# Altium PCB ut_basketball_robot_mainboard_2018.PcbDoc
Units mm, origin at the board's own origin, x right, y up, seen from the top; angles counter-clockwise.
Board outline 55 x 37 mm, 2 copper layers (Top Layer, Bottom Layer), stack 1.571 mm thick; 79 components, 92 nets, 352 pads, 92 vias.
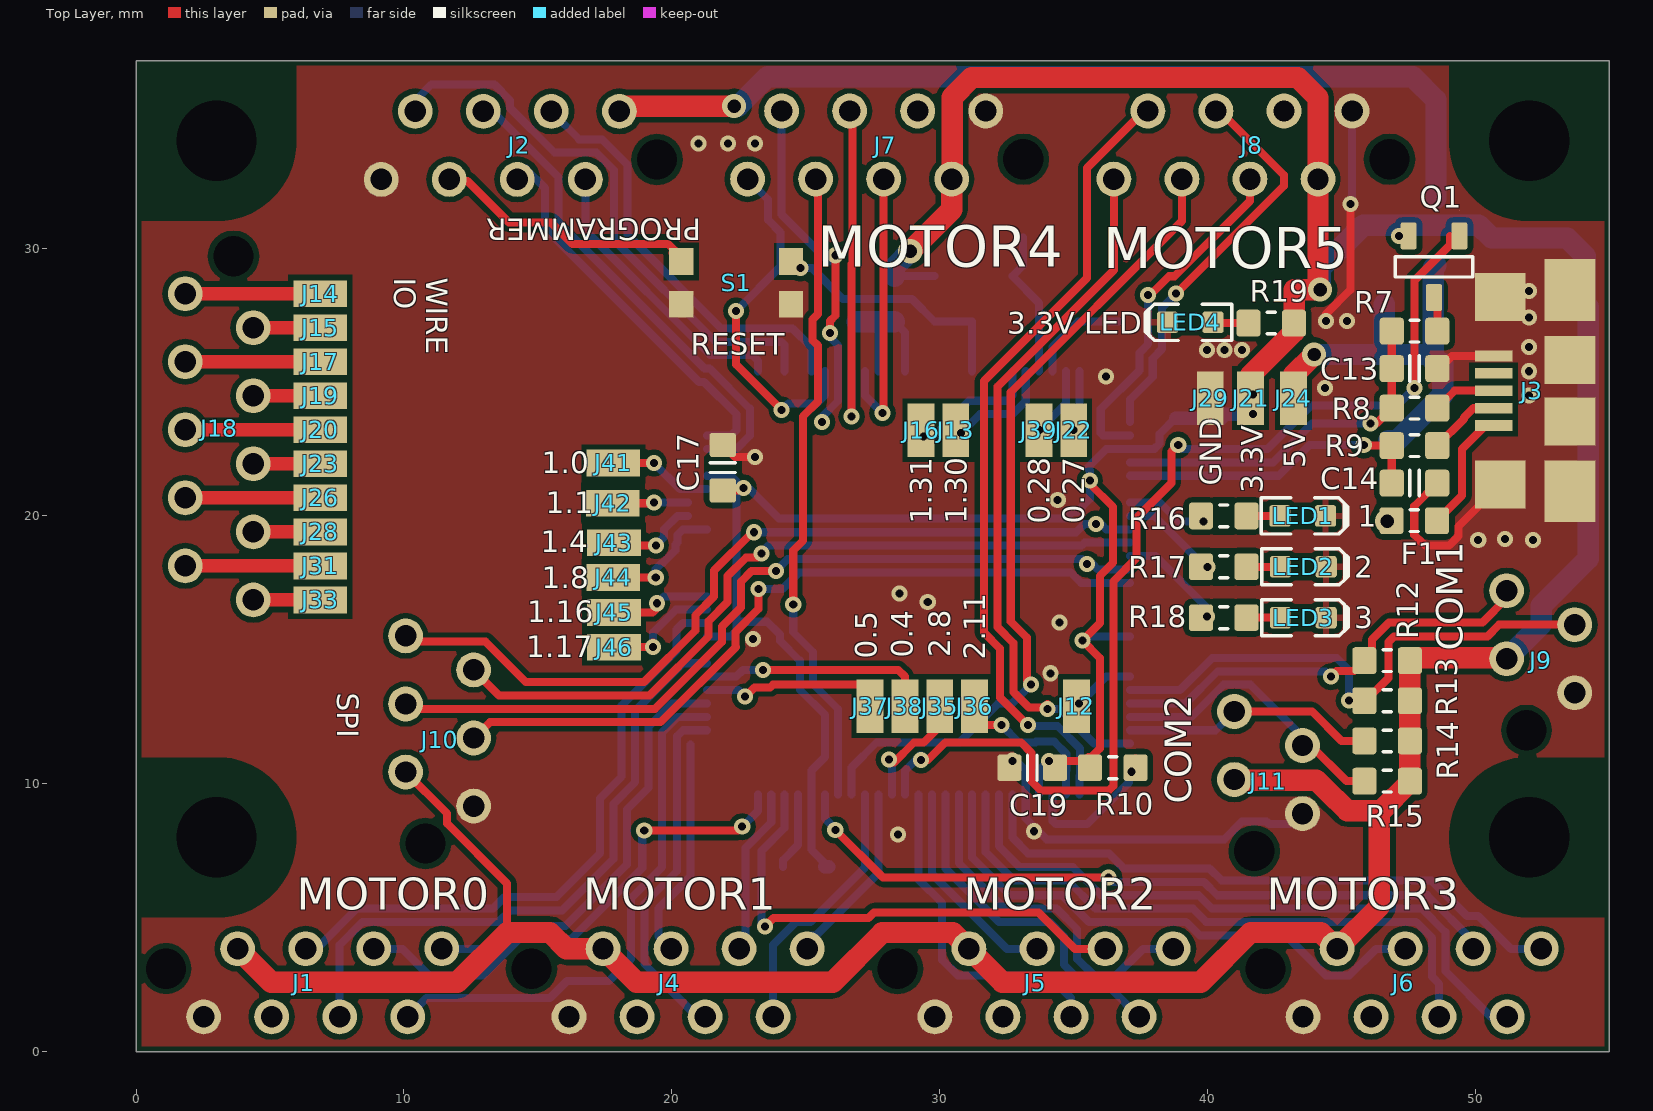
[diagram p0: Top Layer view]
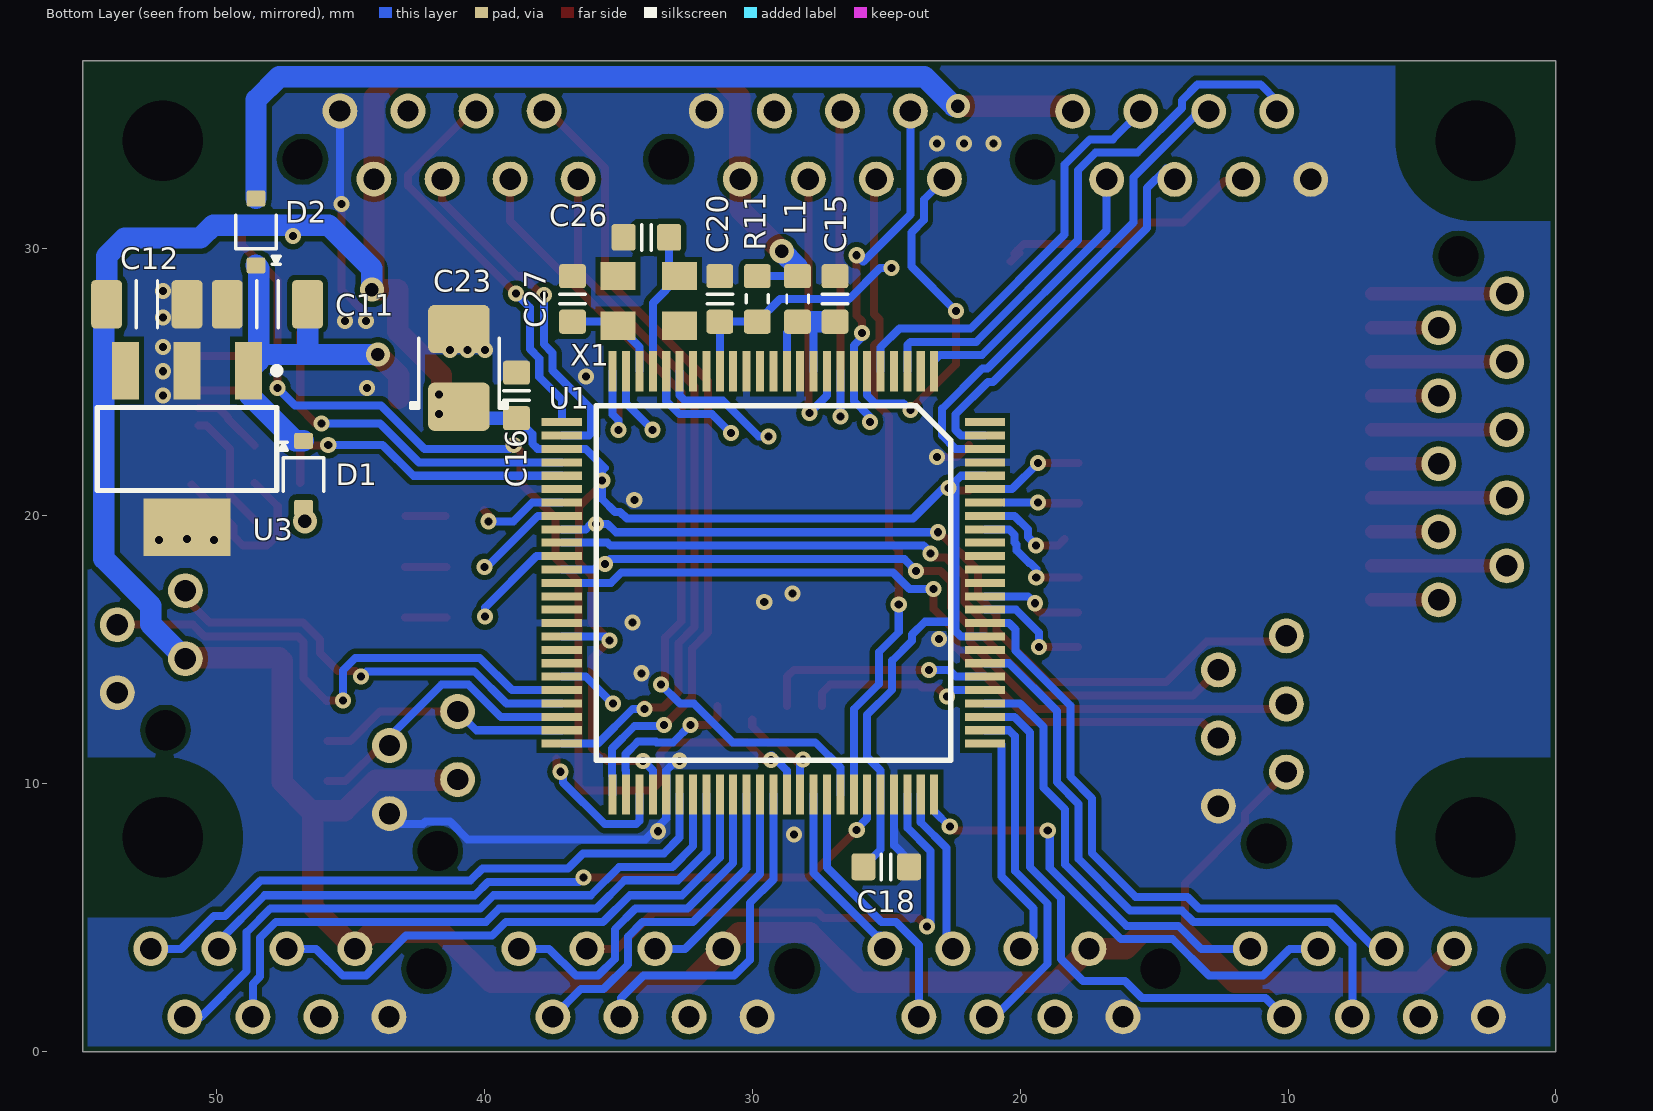
[diagram p1: Bottom Layer view, seen from below]

## Layer stack, top to bottom
Top Solder: solder mask 0.0102, Solder Resist, Dk 3.5
Top Layer: signal copper 0.0356
Dielectric 1: dielectric 1.5, FR-4, Dk 4.8
Bottom Layer: signal copper 0.0356
Bottom Solder: solder mask 0.0102, Solder Resist, Dk 3.5

## Board outline
0,0 55,0 55,37 0,37

## Design rules (kind name [scope] priority, off if disabled: settings)
BoardOutlineClearance [All] p1: gap=0.2 ignorepadtopadclearanceinfootprint=FALSE except(0: Arc-SplitContinuation Track-SplitContinuation SMDPad-SplitContinuation THPad-SplitContinuation Via-SplitContinuation Fill-SplitContinuation Poly-SplitContinuation Region-SplitContinuation Text-SplitContinuation)
Clearance [All] p1: gap=0.2 ignorepadtopadclearanceinfootprint=FALSE except(0: Arc-Hole Track-Hole SMDPad-Hole THPad-Hole Via-Hole Fill-Hole Poly-Hole Region-Hole Text-Hole)
ComponentClearance ComponentClearanceIgnore [HasFootprint('PAD-1020')] p1: gap=0 collisioncheckmode=3 verticalgap=0 showdistances=FALSE
ComponentClearance [All] p2: gap=0.2 collisioncheckmode=3 verticalgap=0.2 showdistances=FALSE
DiffPairsRouting [All] p1: maxlimit=0.3 minlimit=0.2 mostfreqgap=0.2 toplayer_minwidth=0.2 toplayer_maxwidth=0.5 toplayer_prefwidth=0.3 bottomlayer_minwidth=0.2 bottomlayer_maxwidth=0.5 bottomlayer_prefwidth=0.3 maxuncoupledlength=12.7
HoleSize [All] p1: absolutevalues=TRUE maxlimit=5 minlimit=0.3 maxpercent=80.000 minpercent=20.000
PlaneClearance [All] p1: clearance=0.5
PlaneConnect [All] p1: planeconnectstyle=Relief reliefexpansion=0.5 reliefentries=4 reliefconductorwidth=0.3 reliefairgap=0.2
PolygonConnect PolygonConnectDirect [IsVia or InComponent('U3') or InComponent('J3') or InComponent('S1') or InComponent('U4') or HasFootprint('CAPC3216X180N') or HasFootprint('CAPC1608X90N') or HasFootprint('RESC1608X55N') or HasFootprint('CAPMP3528X210N') or HasFootprint('MICRO-MATCH-FOB-04') or HasFootprint('MICRO-MATCH-FOB-06') or HasFootprint('MICRO-MATCH-FOB-08') or HasFootprint('MICRO-MATCH-FOB-10') or HasFootprint('PAD-1020')] p1: connectstyle=Direct reliefconductorwidth=0.2 reliefentries=4 polygonreliefangle="90 Angle" airgapwidth=0.2
PolygonConnect [All] p2: connectstyle=Relief reliefconductorwidth=0.25 reliefentries=4 polygonreliefangle="90 Angle" airgapwidth=0.2
RoomDefinition ut_bbr18_mb_usb [InComponentClass('ut_bbr18_mb_usb')] p1: confinementstyle=ConfineIn formatcopy=TRUE lockcomponents=FALSE outline -26.925,-28.025 132.15,-28.025 132.15,79.25 -26.925,79.25
RoomDefinition ut_basketball_robot_mainboard_2018 [InComponentClass('ut_basketball_robot_mainboard_2018')] p2: confinementstyle=ConfineIn formatcopy=TRUE lockcomponents=FALSE outline -6,-11 118,-11 118,72 -6,72
RoutingVias [All] p1: holewidth=0.3 width=0.6 viastyle="Through Hole" minholewidth=0.3 minwidth=0.6 maxholewidth=5 maxwidth=10
SilkToSilkClearance [All] p1: silktosilkclearance=0.2
SilkToSolderMaskClearance [IsPad] p1: minsilkscreentomaskgap=0.2 clearancetoexposedcopper=TRUE
SolderMaskExpansion SolderMaskExpansionTentedVia [IsVia And (Not IsTestpoint)] p1: expansion=-5
SolderMaskExpansion [All] p2: expansion=0.102
Width [All] p1: maxlimit=5 minlimit=0.2 preferedwidth=0.3
23 further rules are at their usual default settings.

## Classes and differential pairs
component class ut_bbr18_mb_usb: C13 C14 F1 J3 Q1 R7 R8 R9
component class ut_basketball_robot_mainboard_2018: C11 C12 C15 C16 C17 C18 C19 C20 C23 C26 C27 D1 D2 J1 J2 J4 J5 J6 J7 J8 J9 J10 J11 J12 J13 J14 J15 J16 J17 J18 J19 J20 J21 J22 J23 J24 J26 J28 J29 J31 J33 J35 J36 J37 J38 J39 J41 J42 J43 J44 J45 J46 L1 LED1 LED2 LED3 LED4 R10 R11 R12 R13 R14 R15 R16 R17 R18 R19 S1 U1 U3 X1

## Components (designator, comment, footprint, x,y, rotation, side; value= is the part's Value field where it differs from the comment)
C11 "10u" CAPC3216X180N 48.1,27.9 r0 bottom value=10µ
C12 "10u" CAPC3216X180N 52.6,27.9 r180 bottom value=10µ
C13 "18p" CAPC1608X90N 47.722,25.499 r180 top
C14 "18p" CAPC1608X90N 47.722,21.224 r0 top
C15 "1u" CAPC1608X90N 26.91,28.1 r90 bottom value=18p
C16 "10u Ta" CAPMP3528X210N 40.95,25.525 r90 bottom value=47µ
C17 "100n" CAPC1608X90N 21.9,21.8 r90 top value=18p
C18 "100n" CAPC1608X90N 25,6.9 r180 bottom value=18p
C19 "100n" CAPC1608X90N 33.451,10.6 r180 top value=18p
C20 "100n" CAPC1608X90N 31.21,28.1 r90 bottom value=18p
C23 "100n" CAPC1608X90N 38.8,24.5 r90 bottom value=18p
C26 "18p" CAPC1608X90N 33.95,30.4 r0 bottom
C27 "18p" CAPC1608X90N 36.71,28.1 r90 bottom
D1 "BAT60" SOD323 46.75,21.548 r270 bottom
D2 "BAT60" SOD323 48.523,30.6 r90 bottom
F1 "Slow-blow" RESC1608X55N 47.712,19.824 r0 top value=500mA
J1 "MOTOR0" MICRO-MATCH-FOB-08 2.52,1.3 r180 top
J2 "PROGRAMMER" MICRO-MATCH-FOB-08 18.04,35.1 r0 top
J3 "USB-B-MICRO" USB-B-MICRO-FCI-10104110 50.672,24.674 r90 top
J4 "MOTOR1" MICRO-MATCH-FOB-08 16.16,1.3 r180 top
J5 "MOTOR2" MICRO-MATCH-FOB-08 29.82,1.3 r180 top
J6 "MOTOR3" MICRO-MATCH-FOB-08 43.56,1.3 r180 top
J7 "MOTOR4" MICRO-MATCH-FOB-08 31.715,35.115 r0 top
J8 "MOTOR5" MICRO-MATCH-FOB-08 45.39,35.115 r0 top
J9 "COM1" MICRO-MATCH-FOB-04 53.7,13.4 r270 top
J10 "SPI" MICRO-MATCH-FOB-06 12.6,9.17 r270 top
J11 "COM2" MICRO-MATCH-FOB-04 43.54,8.89 r270 top
J12 "HEADER-1" PAD-1020 35.1,12.9 r180 top
J13 "HEADER-1" PAD-1020 30.6,23.2 r180 top
J14 "HEADER-1" PAD-1020 6.875,28.295 r90 top
J15 "HEADER-1" PAD-1020 6.875,27.025 r90 top
J16 "HEADER-1" PAD-1020 29.3,23.2 r180 top
J17 "HEADER-1" PAD-1020 6.875,25.755 r90 top
J18 "WIRE_IO" MICRO-MATCH-FOB-10 1.835,28.295 r90 top
J19 "HEADER-1" PAD-1020 6.875,24.485 r90 top
J20 "HEADER-1" PAD-1020 6.875,23.215 r90 top
J21 "HEADER-1" PAD-1020 41.6,24.4 r0 top
J22 "HEADER-1" PAD-1020 35,23.2 r0 top
J23 "HEADER-1" PAD-1020 6.875,21.945 r90 top
J24 "HEADER-1" PAD-1020 43.2,24.4 r0 top
J26 "HEADER-1" PAD-1020 6.875,20.675 r90 top
J28 "HEADER-1" PAD-1020 6.875,19.405 r90 top
J29 "HEADER-1" PAD-1020 40.1,24.4 r0 top
J31 "HEADER-1" PAD-1020 6.875,18.135 r90 top
J33 "HEADER-1" PAD-1020 6.875,16.865 r90 top
J35 "HEADER-1" PAD-1020 30,12.9 r0 top
J36 "HEADER-1" PAD-1020 31.3,12.9 r0 top
J37 "HEADER-1" PAD-1020 27.4,12.9 r0 top
J38 "HEADER-1" PAD-1020 28.7,12.9 r0 top
J39 "HEADER-1" PAD-1020 33.7,23.2 r180 top
J41 "HEADER-1" PAD-1020 17.819,21.978 r90 top
J42 "HEADER-1" PAD-1020 17.8,20.474 r90 top
J43 "HEADER-1" PAD-1020 17.84,19 r90 top
J44 "HEADER-1" PAD-1020 17.819,17.702 r90 top
J45 "HEADER-1" PAD-1020 17.84,16.4 r90 top
J46 "HEADER-1" PAD-1020 17.84,15.1 r90 top
L1 "10uH" INDC1608N 28.31,28.1 r90 bottom value="120R @ 100 MHz"
LED1 "White" LED-0603-WHITE 43.55,20 r0 top
LED2 "White" LED-0603-WHITE 43.57,18.1 r0 top
LED3 "White" LED-0603-WHITE 43.57,16.2 r0 top
LED4 "White" LED-0603-WHITE 39.35,27.225 r180 top
Q1 "BSS84" SOT23-3 48.45,29.3 r270 top
R7 "1.5k" RESC1608X55N 47.722,26.899 r0 top value=10K
R8 "33R" RESC1608X55N 47.722,24.024 r180 top value=10K
R9 "33R" RESC1608X55N 47.722,22.624 r180 top value=10K
R10 "10k" RESC1608X55N 36.46,10.6 r180 top value=10K
R11 "10k" RESC1608X55N 29.81,28.1 r270 bottom value=10K
R12 "10k" RESC1608X55N 46.7,14.6 r180 top value=10K
R13 "10k" RESC1608X55N 46.7,13.1 r180 top value=10K
R14 "10k" RESC1608X55N 46.7,11.6 r180 top value=10K
R15 "10k" RESC1608X55N 46.7,10.1 r180 top value=10K
R16 "1k" RESC1608X55N 40.6,20 r180 top value=120R
R17 "1k" RESC1608X55N 40.6,18.1 r180 top value=120R
R18 "1k" RESC1608X55N 40.6,16.2 r180 top value=120R
R19 "1k" RESC1608X55N 42.375,27.2 r0 top value=120R
S1 "PUSHBUTTON" KMR421NGLFS 22.4,28.7 r180 top
U1 "LPC1768" LQFP100 23.21,25.4 r270 bottom
U3 "MCP1825S" SOT230P700X180-4N 51.1,22.5 r270 bottom
X1 "12MHz" XTAL-3.2x2.5 35.01,27.1 r180 bottom

## Footprints (in the part's own frame and the unit in brackets; to place one, negate y for a bottom-side part, rotate by r counter-clockwise, add the part's x,y. Pads: shape width x height; smd on the part's side, far side on the other; paste and mask are expansions set on the pad)
CAPC1608X90N [mm] "Chip Capacitor, Body 1.6x0.8mm, EIA 0603, IPC Medium Density"
  round 0.254 on Mech15: 0(0,0)
  rrect25% 0.9x1 smd: 1(-0.85,0) 2(0.85,0)
  Top Layer pour cut-out: -0.6,0.5 -0.4,0.7 0.4,0.7 0.6,0.5 0.6,-0.5 0.4,-0.7 -0.4,-0.7 -0.6,-0.5
  silkscreen extent -0.18,-0.48 0.18,0.48, body extent -0.85,-0.45 0.85,0.45, height 0.89
CAPC3216X180N [mm] "Chip Capacitor, Body 3.2x1.6mm, 1.8mm H, EIA 1206, IPC Medium Density"
  round 0.508 on Mech15: 0(0,0)
  rrect25% 1.15x1.8 smd: 1(-1.5,0) 2(1.5,0)
  silkscreen extent -0.4,-0.88 0.4,0.88, body extent -1.7,-0.9 1.7,0.9, height 1.8
CAPMP3528X210N [mm] "Molded body capacitor, Body 3.5x2.8mm, 1210, IPC Nominal settings"
  round 0.254 on Mech15: 0(0,0)
  rrect25% 1.8x2.3 smd: 1(-1.45,0) 2(1.45,0)
  Top Layer pour cut-out: -0.508,1.27 0.508,1.27 0.508,-1.27 -0.508,-1.27
  silkscreen extent -1.5,-1.8 1.1,1.8, body extent -1.75,-1.4 1.75,1.4, height 2.1
INDC1608N [mm] "Chip bead, Body 1.6x0.8mm, 0603, IPC Medium Density"
  round 0.254 on Mech15: 0(0,0)
  rrect25% 0.9x1 smd: 1(-0.85,0) 2(0.85,0)
  Top Layer pour cut-out: -0.4,0.6 0.4,0.6 0.4,-0.6 -0.4,-0.6
  silkscreen extent -0.15,-0.41 0.15,0.41, body extent -0.8,-0.4 0.8,0.4, height 0.79
KMR421NGLFS [mm]
  rect 0.9x1 smd: 1(-2.05,0.8) 1(2.05,0.8) 2(-2.05,-0.8) 2(2.05,-0.8)
  body extent -2.1,-1.4 2.1,1.4, height 2.5
LED-0603-WHITE [mm]
  round 0.254 on Mech15: 0(0,0)
  rrect25% 0.8x0.8 smd: A(-0.85,0) K(0.85,0)
  Top Layer pour cut-out: -0.5,0.5 0.5,0.5 0.5,-0.5 -0.5,-0.5
  silkscreen extent -1.55,-0.67 1.68,0.67, body extent -0.8,-0.4 0.8,0.4, height 0.75
LQFP100 [mm]
  rect 1.5x0.3 smd: 1(0,0) 2(0,-0.5) 3(0,-1) 4(0,-1.5) 5(0,-2) 6(0,-2.5) 7(0,-3) 8(0,-3.5) 9(0,-4) 10(0,-4.5) 11(0,-5) 12(0,-5.5) 13(0,-6) 14(0,-6.5) 15(0,-7) 16(0,-7.5) 17(0,-8) 18(0,-8.5) 19(0,-9) 20(0,-9.5) 21(0,-10) 22(0,-10.5) 23(0,-11) 24(0,-11.5) 25(0,-12) 51(15.8,-12) 52(15.8,-11.5) 53(15.8,-11) 54(15.8,-10.5) 55(15.8,-10) 56(15.8,-9.5) 57(15.8,-9) 58(15.8,-8.5) 59(15.8,-8) 60(15.8,-7.5) 61(15.8,-7) 62(15.8,-6.5) 63(15.8,-6) 64(15.8,-5.5) 65(15.8,-5) 66(15.8,-4.5) 67(15.8,-4) 68(15.8,-3.5) 69(15.8,-3) 70(15.8,-2.5) 71(15.8,-2) 72(15.8,-1.5) 73(15.8,-1) 74(15.8,-0.5) 75(15.8,0)
  rect 0.3x1.5 smd: 26(1.9,-13.9) 27(2.4,-13.9) 28(2.9,-13.9) 29(3.4,-13.9) 30(3.9,-13.9) 31(4.4,-13.9) 32(4.9,-13.9) 33(5.4,-13.9) 34(5.9,-13.9) 35(6.4,-13.9) 36(6.9,-13.9) 37(7.4,-13.9) 38(7.9,-13.9) 39(8.4,-13.9) 40(8.9,-13.9) 41(9.4,-13.9) 42(9.9,-13.9) 43(10.4,-13.9) 44(10.9,-13.9) 45(11.4,-13.9) 46(11.9,-13.9) 47(12.4,-13.9) 48(12.9,-13.9) 49(13.4,-13.9) 50(13.9,-13.9) 76(13.9,1.9) 77(13.4,1.9) 78(12.9,1.9) 79(12.4,1.9) 80(11.9,1.9) 81(11.4,1.9) 82(10.9,1.9) 83(10.4,1.9) 84(9.9,1.9) 85(9.4,1.9) 86(8.9,1.9) 87(8.4,1.9) 88(7.9,1.9) 89(7.4,1.9) 90(6.9,1.9) 91(6.4,1.9) 92(5.9,1.9) 93(5.4,1.9) 94(4.9,1.9) 95(4.4,1.9) 96(3.9,1.9) 97(3.4,1.9) 98(2.9,1.9) 99(2.4,1.9) 100(1.9,1.9)
  silkscreen extent 1.28,-12.61 14.51,0.62, body extent -0.1,-14 15.9,2, height 1.6
MICRO-MATCH-FOB-04 [mm]
  round 1.3 hole 0.8: 1(0,0) 2(-1.27,-2.54) 3(-2.54,0) 4(-3.81,-2.54)
  round 0 hole 1.5 unplated: drill(1.4,-1.8)
  body extent -5.41,-3.77 1.6,1.23, height 4
MICRO-MATCH-FOB-06 [mm]
  round 1.3 hole 0.8: 1(0,0) 2(-1.27,-2.54) 3(-2.54,0) 4(-3.81,-2.54) 5(-5.08,0) 6(-6.35,-2.54)
  round 0 hole 1.5 unplated: drill(1.4,-1.8)
  body extent -7.95,-3.77 1.6,1.23, height 4
MICRO-MATCH-FOB-08 [mm]
  round 1.3 hole 0.8: 1(0,0) 2(-1.27,-2.54) 3(-2.54,0) 4(-3.81,-2.54) 5(-5.08,0) 6(-6.35,-2.54) 7(-7.62,0) 8(-8.89,-2.54)
  round 0 hole 1.5 unplated: drill(1.4,-1.8)
  body extent -10.49,-3.77 1.6,1.23, height 4
MICRO-MATCH-FOB-10 [mm]
  round 1.3 hole 0.8: 1(0,0) 2(-1.27,-2.54) 3(-2.54,0) 4(-3.81,-2.54) 5(-5.08,0) 6(-6.35,-2.54) 7(-7.62,0) 8(-8.89,-2.54) 9(-10.16,0) 10(-11.43,-2.54)
  round 0 hole 1.5 unplated: drill(1.4,-1.8)
  body extent -13.03,-3.77 1.6,1.23, height 4
PAD-1020 [mm]
  rect 1x2 smd: 1(0,0)
RESC1608X55N [mm] "Chip Resistor, Body 1.6x0.8mm, EIA 0603, IPC Medium Density"
  round 0.254 on Mech15: 0(0,0)
  rrect25% 0.9x1 smd: 1(-0.85,0) 2(0.85,0)
  Top Layer pour cut-out: -0.6,0.5 -0.4,0.7 0.4,0.7 0.6,0.5 0.6,-0.5 0.4,-0.7 -0.4,-0.7 -0.6,-0.5
  silkscreen extent -0.15,-0.41 0.15,0.41, body extent -0.87,-0.47 0.88,0.48, height 0.54
SOD323 [mm] "SOD-323; 2 Leads; Body 1.8 x 1.35 mm, (LxW)"
  round 0.508 on Mech15: 0(0,0)
  rrect25% 0.6x0.7 smd: A(1.25,0) K(-1.25,0)
  silkscreen extent -1.2,-0.9 0.64,0.75, body extent -1.3,-0.68 1.3,0.67, height 1.1
SOT23-3 [mm] "SOT23, 3 pin"
  round 0.5 on Mech15: 0(0,0)
  rrect25% 1x0.6 smd: 1(-1.15,0.95) 2(-1.15,-0.95) 3(1.15,0)
  silkscreen extent -0.38,-1.45 0.38,1.45, body extent -1.4,-1.45 1.4,1.45, height 1.29
SOT230P700X180-4N [mm] "SOT223, 4-Leads, Body 6,50x7,00mm (avg), Pitch 2,30mm, IPC Medium Density"
  rect 2.15x1 smd: 1(-2.925,2.3) 2(-2.925,0) 3(-2.925,-2.3)
  rect 2.15x3.25 smd: 4(2.925,0)
  silkscreen extent -3.05,-3.35 1.55,3.47, body extent -1.85,-3.35 1.85,3.35, height 1.8
USB-B-MICRO-FCI-10104110 [mm]
  rect 0.4x1.4 smd: 1(-1.3,0) 2(-0.65,0) 3(0,0) 4(0.65,0) 5(1.3,0)
  rect 2.3x1.9 smd: SH(-3.75,-2.85) SH(3.758,-2.85)
  rect 1.8x1.9 smd: SH(-3.5,-0.25) SH(-1.15,-2.85) SH(1.15,-2.85) SH(3.5,-0.25)
  body extent -4.04,-5.55 4.04,0.01, height 2.68
XTAL-3.2x2.5 [mm]
  rect 1.3x1.05 smd: 1(0,0) 2(2.3,0) 3(2.3,1.85) 4(0,1.85)
  body extent -0.45,-0.32 2.75,2.18, height 0.8

## Part data
C11 C12: library part CAPC_10u_1206_10V, "Capacitor SMD Cer 10uF 10% 10V X5R 1206", Manufacturer 1=KEMET, Manufacturer Part Number 1=C1206C106K8PACTU, Package / Case="1206 (3216 metric)", Ratings="10V; X5R", Supplier Part Number 1=C1206C106K8PACTU-ND, Tolerance=±10%, Material=ceramic, SCDType=undef, Supplier 1=Digi-Key
C13 C14 C15 C17 C18 C19 C20 C23 C26 C27: library part CAPC_18p_0603_100V, "Capacitor SMD Cer 18pF 2% 100V NP0 0603", Manufacturer 1="AVX Corporation", Manufacturer Part Number 1=06031A180GAT2A, Operating Temperature="-55°C ~ 125°C", Package / Case="0603 (1608 Metric)", Ratings="100V; NP0", Supplier Part Number 1=478-6025-1-ND, Tolerance=±2%, ComponentLink1Description=http://www.avx.com/docs/Catalogs/ccog.pdf, ComponentLink1URL=http://www.avx.com/docs/Catalogs/ccog.pdf, SCDType=spec, Size / Dimension="0.063\" L x 0.032\" W (1.60mm x 0.81mm)", Supplier 1=Digi-Key, Thickness (Max)="0.035\" (0.90mm)"
C16: library part CAPT_47u_1210_6V3, "Capacitor SMD Tantalum 47uF 20% 6.3V 1210", ESR (Equivalent Series Resistance)="70.0 mOhm", Manufacturer 1="AVX Corporation", Manufacturer Part Number 1=TCJB476M006R0070, Manufacturer Size Code=B, Operating Temperature="-55°C ~ 125°C", Package / Case="1210 (3528 Metric)", Ratings=6.3V, Supplier Part Number 1=478-3139-1-ND, Tolerance=±20%, Voltage - Rated=6V3, ComponentLink1Description=http://www.avx.com/docs/Catalogs/tcj.pdf, ComponentLink1URL=http://www.avx.com/docs/Catalogs/tcj.pdf, Height - Seated (Max)="0.083\" (2.10mm)", Material=Tantalum, SCDType=spec, Size / Dimension="0.138\" L x 0.110\" W (3.50mm x 2.80mm)", Supplier 1=Digi-Key, Type=Molded
D1 D2: library part DIODE_SCHOTTKY_SS0520, "Diode Schottky SMD 20V 0.5A SOD123", Manufacturer 1="Fairchild Semiconductor", Manufacturer 2="ON Semiconductor", Manufacturer 3="Diodes Inc", Manufacturer 4="DC Components Co", Manufacturer Part Number 1=MBR0520L, Manufacturer Part Number 2=MBR0520LT1G, Manufacturer Part Number 3=B0520LW-7-F, Manufacturer Part Number 4=SS0520, Package / Case=SOD-123, Ratings="20V; 0.5A", Supplier Part Number 1=MBR0520LCT-ND, ComponentLink1Description=http://www.fairchildsemi.com/ds/MB/MBR0520L.pdf, ComponentLink1URL=http://www.fairchildsemi.com/ds/MB/MBR0520L.pdf, ComponentLink2Description=http://www.onsemi.com/pub_link/Collateral/MBR0520LT1-D.PDF, ComponentLink2URL=http://www.onsemi.com/pub_link/Collateral/MBR0520LT1-D.PDF, ComponentLink3Description=http://www.diodes.com/datasheets/ds30051.pdf, ComponentLink3URL=http://www.diodes.com/datasheets/ds30051.pdf, Material=Si, SCDType=source, Supplier 1=Digi-Key, Supplier 2=Digi-Key, Supplier 3=Digi-Key, Supplier Part Number 2=MBR0520LT1GOSCT-ND, Supplier Part Number 3=B0520LW-FDICT-ND
F1: library part FUSE_160mA_0603, "Fuse 160mA 63VDC 0603 SMD", Manufacturer 1="Holly Fuse", Manufacturer Part Number 1=06T-0160L, Package / Case="0603 (1608 metric)", Ratings="160mA; 63VDC; slow-blow", SCDType=spec
J1 J2 J4 J5 J6 J7 J8: library part HEADER-8
J9 J11: library part HEADER-4
J10: library part HEADER-6
J18: library part HEADER-10
L1: library part FERRITE_120R-100MHz_0603, "Ferrite bead 120 Ohm at 100 MHz 2A 0603 SMD", Current=900mA, Current Rating=2A, DC Resistance (DCR)="172.9 mOhm Max", Frequency - Self Resonant=23MHz, Frequency - Test=100kHz, Impedance @ Frequency="120 Ohm @ 100MHz", Manufacturer 1="Murata Electronics North America", Manufacturer Part Number 1=BLM18PG121SN1D, Operating Temperature="-40°C ~ 105°C", Package / Case="1210 (3225 Metric)", Ratings="2 A; 50 mO DC", Supplier Part Number 1=490-1037-1-ND, Applications="Power Supplies", ComponentLink1Description=http://www.yuden.co.jp/ut/product/pdf/wound02_e.pdf, ComponentLink1URL=http://www.yuden.co.jp/ut/product/pdf/wound02_e.pdf, ComponentLink2Description=http://search.murata.co.jp/Ceramy/image/img/PDF/ENG/L0110S0100BLM18P.pdf, ComponentLink2URL=http://search.murata.co.jp/Ceramy/image/img/PDF/ENG/L0110S0100BLM18P.pdf, Current - Saturation=900mA, Current - Temperature Rise=900mA, Filter Type="Differential Mode - Single", Height (Max)="0.037\" (0.95mm)", Mounting Type="Surface Mount", Number of Lines=1, SCDType=source, Size / Dimension="0.063\" L x 0.031\" W (1.60mm x 0.80mm)", Supplier 1=Digi-Key
LED1 LED2 LED3 LED4: library part LED_SMD_White_0603_Bright, "LED 0603 SMD Bright White 8700K", Luminous Flux @ Current - Test=-, Manufacturer 1="Lite-On Inc", Manufacturer 2="Kingbright Corp", Manufacturer Part Number 1=LTW-C193TS5, Manufacturer Part Number 2=APT1608QWF/D, Millicandela Rating=230mcd, Package / Case="0603 (1608 metric)", Ratings="Ultra Bright; 8700K", Supplier Part Number 1=160-1721-1-ND, Voltage - Forward (Vf) @ 10mA=3.0V, Voltage - Forward (Vf) Typ=3.3V, Color=White, ComponentLink1Description=http://media.digikey.com/pdf/Data%20Sheets/Lite-On%20PDFs/LTW-C193TS5.pdf, ComponentLink1URL=http://media.digikey.com/pdf/Data%20Sheets/Lite-On%20PDFs/LTW-C193TS5.pdf, ComponentLink2Description=http://www.kingbrightusa.com/images/catalog/SPEC/APT1608QWF-D.pdf, ComponentLink2URL=http://www.kingbrightusa.com/images/catalog/SPEC/APT1608QWF-D.pdf, Lens Style/Size="Rectangle with Flat Top, 0.8mm x 1.1mm", Lens Type="Clear, Tinted", Material=InGaN, Mounting Type="Surface Mount", SCDType=source, Size / Dimension="1.60mm L x 0.80mm W", Supplier 1=Digi-Key, Supplier 2=Digi-Key, Supplier Part Number 2=APT1608QWF/D-ND, Viewing Angle=120°
Q1: library part MOSFET_BSS84, "MOSFET SMD P-CH 50V 130mA SOT23-3", Current - Continuous Drain (Id) @ 25° C=130mA, Drain to Source Voltage (Vdss)=50V, Input Capacitance (Ciss) @ Vds="73pF @ 25V", Manufacturer 1="Fairchild Semiconductor", Package / Case=SOT23-3, Power - Max=360mW, Ratings="50V; 130mA", Supplier Device Package=SOT-23, Supplier Part Number 1=BSS84CT-ND, ComponentLink1Description=http://www.fairchildsemi.com/ds/BS/BSS84.pdf, ComponentLink1URL=http://www.fairchildsemi.com/ds/BS/BSS84.pdf, FET Feature="Logic Level Gate", FET Type="MOSFET P-Channel, Metal Oxide", Gate Charge (Qg) @ Vgs="1.3nC @ 5V", Manufacturer Part Number 1=BSS84, Material="Metal Oxide", Rds On (Max) @ Id, Vgs="10 Ohm @ 100mA, 5V", SCDType=undef, Supplier 1=Digi-Key, Vgs(th) (Max) @ Id="2V @ 1mA"
R7 R8 R9 R10 R11 R12 R13 R14 R15: library part RES_10K_0603_5%, "Resistor SMD chip 10k Ohm 0.1W 5% 0603", Manufacturer 1=Yageo, Manufacturer 2="Vishay Dale", Manufacturer Part Number 1=RC0603JR-0710KL, Manufacturer Part Number 2=CRCW060310K0JNEA, Package / Case="0603 (1608 metric)", Ratings="1/10 W", Supplier Part Number 1=311-10KGRCT-ND, Tolerance=±5%, ComponentLink1Description=http://www.yageo.com/documents/recent/PYu-RC0603_51_RoHS_L_4.pdf, ComponentLink1URL=http://www.yageo.com/documents/recent/PYu-RC0603_51_RoHS_L_4.pdf, ComponentLink2Description=http://www.vishay.com/doc?20035, ComponentLink2URL=http://www.vishay.com/doc?20035, Material="Thick Film", SCDType=spec, Supplier 1=Digi-Key, Supplier 2=Digi-Key, Supplier Part Number 2=541-10KGCT-ND
R16 R17 R18 R19: library part RES_120R_0603_5%, "Resistor SMD chip 120 Ohm 0.1W 5% 0603", Manufacturer 1="Vishay Dale", Manufacturer 2=Yageo, Manufacturer Part Number 1=CRCW0603120RJNEA, Manufacturer Part Number 2=RC0603JR-07120RL, Package / Case="0603 (1608 metric)", Ratings="1/10 W", Supplier Part Number 1=541-120GCT-ND, Tolerance=±5%, ComponentLink1Description=http://www.vishay.com/doc?20035, ComponentLink1URL=http://www.vishay.com/doc?20035, ComponentLink2Description=http://www.yageo.com/documents/recent/PYu-RC0603_51_RoHS_L_4.pdf, ComponentLink2URL=http://www.yageo.com/documents/recent/PYu-RC0603_51_RoHS_L_4.pdf, Material="Thick Film", SCDType=spec, Supplier 1=Digi-Key, Supplier 2=Digi-Key, Supplier Part Number 2=311-120GRCT-ND
U3: library part MIC5239
X1: library part XTAL-3.2X2.5

## Free pads (board coordinates)
  round 0 hole 3 unplated: 42(52,8) 43(3,8) 44(3,34) 45(52,34)

## Via types
v1: diameter 0.6, hole 0.3, Top Layer to Bottom Layer, 87 vias
v2: diameter 0.9, hole 0.5, Top Layer to Bottom Layer, 5 vias

## Nets (pads, with @x,y where several pads share a name; then routed paths per layer and width w, separated by ;. In a path a pad name is that pad's centre, name@x,y a point inside that pad or via, vN(x,y) a via of type N, cw(c..) or ccw(c..) an arc to the next point about the centre after c; other vN are vias at no path point)
0.4: J38.1 U1.81 | length 8.7
  Top Layer w0.3: v1(23.4,14.25) 28.45,14.25 28.7,14 J38.1
  Bottom Layer w0.3: U1.81 22.4,14 22.65,14.25 v1(23.4,14.25)
0.5: J37.1 U1.80 | length 7
  Top Layer w0.3: v1(22.732,13.252) 23.08,13.6 23.669,13.6 23.769,13.7 27.1,13.7 27.4,13.4 J37.1
  Bottom Layer w0.3: U1.80 22.484,13.5 v1(22.732,13.252)
1.0: J41.1 U1.95 | length 3.9
  Top Layer w0.3: J41.1 v1(19.326,21.978)
  Bottom Layer w0.3: v1(19.326,21.978) 20.304,21 U1.95
1.1: J42.1 U1.94 | length 2.8
  Top Layer w0.3: J42.1 19.3,20.474 v1(19.326,20.5)
  Bottom Layer w0.3: v1(19.326,20.5) U1.94@20.605,20.5
1.16: J45.1 U1.87 | length 3.8
  Top Layer w0.3: J45.1 19.275,16.4 19.44,16.565 v1(19.44,16.74)
  Bottom Layer w0.3: v1(19.44,16.74) 19.7,17 U1.87
1.17: J46.1 U1.86 | length 4.6
  Top Layer w0.3: J46.1 19.123,15.1 19.3,15.277 v1(19.3,15.1)
  Bottom Layer w0.3: v1(19.3,15.1) 19.3,15.64 20.16,16.5 U1.86
3.3V: C12.1 C16.1 C17.1 C18.1 C19.1 C23.1 J1.2 J4.2 J5.2 J6.2 J7.2 J8.2 J9.2 J10.2 J11.2 J21.1 L1.2 Q1.2 R10.2 R11.1 R12.1 R13.1 R14.1 R15.1 R19.2 U1.28 U1.42 U1.54 U1.71 U1.84 U1.96 U3.3 | length 198.5
  Top Layer w0.3: J10.2 11.6,8.9 11.6,8.526 13.85,6.276 13.85,4.45 ; C17.1 22.578,20.95 v1(22.667,21.038) ; v1(34.077,10.851) 35.409,10.851 35.559,11.001 35.61,10.95 35.975,11.315 35.975,14.702 v1(35.327,15.351) 35.985,16.009 35.985,17.766 36.475,18.256 36.475,20.328 35.6,21.203 v1(35.6,21.315)
  Top Layer w0.8: J1.2 5.04,2.59 11.99,2.59 13.85,4.45 15.45,4.45 16.06,3.84 J4.2 18.68,2.59 26,2.59 27.86,4.45 30.48,4.45 J5.2 32.34,2.59 39.741,2.59 41.601,4.45 42.719,4.45 44.22,4.45 J6.2 46.412,5.422 46.412,8.93 46.483,9 ; v2(28.9,29.881) 30.445,31.426 J7.2 30.465,32.595 30.465,35.633 31.197,36.365 43.368,36.365 44.12,35.613 J8.2 44.12,28.527 v2(44.2,28.447) 43.225,28.447 R19.2 43.225,26.873 41.6,25.248 J21.1 ; J11.2 41.02,10.14 44.058,10.14 44.79,9.408 44.81,9.408 45.217,9 46.483,9 ; J9.2@51.16,14.7 47.65,14.7 R12.1 R13.1 R14.1 R15.1 47.55,10.067 46.483,9
  Bottom Layer w0.3: U1.84 22.205,15.5 22.41,15.705 22.41,15.925 ; U1.96 22.205,21.5 22.41,21.295 22.41,15.925 ; v1(22.667,21.038) 22.858,21.038 23.996,19.9 34.681,19.9 34.931,20.15 35.127,20.15 35.6,20.623 v1(35.6,21.315) 35.6,21.695 35.505,21.79 36.215,22.5 U1.28 38.018,22.5 38.018,22.513 38.21,22.705 38.21,23.06 C23.1 ; C18.1 25.21,7.54 U1.71 25.21,10.495 25.71,10.995 25.71,12.578 24.777,13.511 24.777,14.596 24.031,15.341 24.031,15.57 23.552,16.05 22.535,16.05 22.41,15.925 ; L1.2 R11.1 ; U1.54 33.71,10.495 34.066,10.851 v1(34.077,10.851) v1@34.027,10.9 ; v1(35.327,15.351) 35.476,15.5 U1.42
  Bottom Layer w0.5: C18.1@25.7,6.9 C18.1 ; C23.1 40.533,23.65 40.683,23.8 v1(41.7,23.8)
  Bottom Layer w0.8: L1.2 28.31,29.291 v2(28.9,29.881) ; v2(44.2,28.447) 44.2,29.243 45.807,30.85 50.125,30.85 50.6,30.375 53.424,30.375 54.1,29.699 C12.1 54.2,27.8 54.2,18.4 52.45,16.65 52.45,15.96 J9.2
  other v1: 41.7,24.525 47.15,30.45
5V: C11.1 D1.K D2.K J24.1 U3.1 | length 15.9
  Top Layer w0.8: J24.1 43.2,25.25 v2(43.975,26.025)
  Bottom Layer w0.8: v2(43.975,26.025) 46.6,26.025 ; C11.1 46.6,26.025 ; D1.K 47.055,22.798 48.774,24.516 48.774,25.702 48.523,25.702 U3.1@48.425,25.8 ; D2.K 48.425,29.252 48.425,26.025 46.6,26.025
5V_IF: D2.A J2.1 | length 35.1
  Top Layer w0.8: J2.1 18.24,35.3 v2(22.325,35.3)
  Bottom Layer w0.8: v2(22.325,35.3) 22.482,35.3 23.572,36.39 47.661,36.39 48.523,35.528 D2.A
5V_USB: D1.A F1.1 | length 0.2
  Top Layer w0.5: F1.1@46.7,19.7 v2(46.7,19.8)
  Bottom Layer w0.5: v2@46.6,19.9 v2(46.7,19.8)
D+: J3.3 R8.1 | length 2.4
  Top Layer w0.3: R8.1 49.222,24.674 J3.3
D-: J3.2 R9.1 | length 2.7
  Top Layer w0.3: R9.1 49.571,23.623 49.571,23.671 49.924,24.024 J3.2
GND: C11.2 C12.2 C13.1 C14.2 C15.2 C16.2 C17.2 C18.2 C19.2 C20.2 C23.2 C26.2 C27.2 J1.1 J2.8 J3.5 J3.SH J4.1 J5.1 J6.1 J7.1 J8.1 J9.1 J10.1 J11.1 J29.1 LED1.K LED2.K LED3.K LED4.K S1.1 U1.11 U1.15 U1.31 U1.41 U1.55 U1.72 U1.83 U1.97 U3.2 U3.4 | length 35.3
  Top Layer w0.3: C17.2 22.35,22.2 v1(23.1,22.2) ; C19.2@32.8,10.885 C19.2@32.82,10.885 ; v1(44.416,27.275) 44.416,27.532 45.325,28.441 v1(45.325,31.645) ; C14.2 47.712,20.364 47.712,19.295 48.033,18.974 48.048,18.974 48.122,18.9 49.017,18.9 49.362,19.245 49.362,19.614 J3.SH@50.922,21.174 ; C13.1@48.572,25.424 49.122,25.974 J3.5
  Bottom Layer w0.3: C18.2 24.15,7.15 24.71,7.71 U1.72 ; v1@32.82,10.885 33.21,10.495 U1.55 33.21,8.705 33.985,7.93 40.624,7.93 41.284,8.59 42.196,8.59 42.286,8.5 43.2,8.5 J11.1@43.6,8.9 ; v1(45.325,31.645) 45.39,31.71 J8.1
  other v1: 28.436,8.1 33.516,8.229 32.72,10.86 34.128,14.126 23.025,15.4 34.475,16.025 29.551,16.785 28.5,17.1 50.1,19.095 52.148,19.095 51.1,19.137 34.404,20.6 52,24.5 44.377,24.776 36.21,25.2 52,25.4 39.975,26.2 40.625,26.2 41.275,26.2 52,26.3 45.2,27.275 52,27.4 52,28.4 21,33.9 22.1,33.9 23.1,33.9
ISP: R10.1 U1.53 | length 5.4
  Top Layer w0.3: R10.1@37.31,10.45 R10.1@37.31,10.95
  Bottom Layer w0.3: U1.53 34.21,8.62 34.33,8.5 35.505,8.5 37.06,10.055 v1@37.06,10.45
  other v1: 37.16,10.45
LED1: R16.2 U1.32 | length 3.5
  Top Layer w0.3: v1(39.84,19.8) 39.84,20.044 R16.2@40.02,20.224
  Bottom Layer w0.3: U1.32 38.212,20.5 38.912,19.8 v1(39.84,19.8)
LED2: R17.2 U1.33 | length 3.7
  Bottom Layer w0.3: U1.33 38.005,20 39.905,18.1 v1(40,18.1)
LED3: R18.2 U1.36 | length 4.1
  Top Layer w0.3: v1(39.976,16.244) R18.2@40.02,16.2
  Bottom Layer w0.3: U1.36 38.05,18.5 39.976,16.574 v1(39.976,16.244)
M0_DIR1: J1.4 U1.85 | length 23.2
  Bottom Layer w0.3: J1.4 6.74,3.84 8.24,5.34 13.323,5.34 13.758,5.775 15.686,5.775 17.319,7.408 17.319,9.458 18.128,10.267 18.128,12.92 20.175,14.967 20.175,15.76 20.415,16 U1.85
M0_DIR2: J1.5 U1.82 | length 23.5
  Bottom Layer w0.3: J1.5 7.6,3.984 8.456,4.84 13.53,4.84 13.965,5.275 15.893,5.275 17.819,7.201 17.819,9.251 18.628,10.06 18.628,12.713 20.415,14.5 U1.82
M0_ENCA: J1.7 U1.78 | length 20.1
  Bottom Layer w0.3: J1.7 10.84,2 15.446,2 16.09,2.644 17.649,2.644 18.47,3.466 18.47,5.729 19.628,6.887 19.628,11.92 20.208,12.5 U1.78
M0_ENCB: J1.8 U1.79 | length 16.3
  Bottom Layer w0.3: J1.8@11.41,3.91 J1.8 13.237,3.84 14.097,4.7 16.025,4.7 18.319,6.994 18.319,9.044 19.128,9.853 19.128,12.127 20.001,13 U1.79
M0_PWM: J1.6 U1.75 | length 18.7
  Top Layer w0.3: v1@18.894,8.25 v1(18.969,8.25) 22.476,8.25 v1(22.626,8.4)
  Bottom Layer w0.3: J1.6 9.94,3.84 10.94,2.84 12.944,2.84 14.304,4.2 16.234,4.2 18.894,6.86 v1@18.894,8.25 ; v1(22.626,8.4) 23.21,8.984 U1.75
M1_DIR1: J4.4 U1.76 | length 8.3
  Bottom Layer w0.3: J4.4 19.5,4.31 19.5,5.345 20.7,6.545 U1.76@20.7,11.475
M1_DIR2: J4.5 U1.77 | length 13.3
  Bottom Layer w0.3: J4.5 20.953,1.3 18.97,3.283 18.97,5.522 20.2,6.752 20.2,11.785 20.415,12 U1.77
M1_ENCA: J4.7 U1.67 | length 10
  Bottom Layer w0.3: J4.7 23.78,3.984 24.636,4.84 25.169,4.84 27.21,6.881 U1.67
M1_ENCB: J4.8 U1.66 | length 7
  Bottom Layer w0.3: J4.8 25.05,4.175 25.215,4.34 25.376,4.34 27.71,6.674 U1.66
M1_PWM: J4.6 U1.74 | length 6.3
  Bottom Layer w0.3: J4.6 22.51,4.093 22.75,4.333 22.75,7.605 23.71,8.565 U1.74
M2_DIR1: J5.4 U1.62 | length 8
  Bottom Layer w0.3: U1.62 29.71,6.634 32.504,3.84 J5.4
M2_DIR2: J5.5 U1.63 | length 12.6
  Bottom Layer w0.3: U1.63 29.21,6.425 30.09,5.545 30.09,3.426 30.676,2.84 34.065,2.84 34.9,2.005 J5.5
M2_ENCA: J5.7 U1.61 | length 12.9
  Bottom Layer w0.3: U1.61 30.21,6.841 32.211,4.84 34.096,4.84 34.63,4.306 34.63,3.259 35.549,2.34 36.4,2.34 J5.7
M2_ENCB: J5.8 U1.60 | length 13.4
  Bottom Layer w0.3: U1.60 30.71,7.048 32.418,5.34 34.36,5.34 35.13,4.57 35.13,3.466 35.756,2.84 36.584,2.84 37.584,3.84 J5.8
M2_PWM: J5.6 U1.73 | length 18.8
  Top Layer w0.3: v1(23.481,4.675) 23.793,4.987 27.336,4.987 27.549,5.2 33.684,5.2 35.044,3.84 J5.6
  Bottom Layer w0.3: v1(23.481,4.675) 23.35,4.806 23.35,7.498 24.21,8.358 U1.73
M3_DIR1: J6.4 U1.59 | length 20.7
  Bottom Layer w0.3: U1.59 31.21,7.256 32.626,5.84 34.567,5.84 35.567,4.84 39.2,4.84 39.707,4.333 42.923,4.333 44.416,2.84 45.285,2.84 46.285,3.84 J6.4
M3_DIR2: J6.5 U1.58 | length 23.2
  Bottom Layer w0.3: U1.58 31.71,7.463 32.773,6.4 34.76,6.4 35.82,5.34 39.446,5.34 39.946,4.84 47.784,4.84 48.37,4.254 48.37,2.805 48.64,2.535 J6.5
M3_ENCA: J6.7 U1.57 | length 24.4
  Bottom Layer w0.3: U1.57 32.21,7.671 32.981,6.9 34.967,6.9 36.027,5.84 39.653,5.84 40.153,5.34 47.991,5.34 48.87,4.461 48.87,3.012 50.582,1.3 J6.7
M3_ENCB: J6.8 U1.56 | length 23.1
  Bottom Layer w0.3: U1.56 32.71,7.991 33.301,7.4 36.319,7.4 36.879,6.84 40.075,6.84 40.525,6.39 48.356,6.39 49.681,5.064 50.1,5.064 51.324,3.84 J6.8
M3_PWM: J6.6 U1.70 | length 27.3
  Top Layer w0.3: v1(26.1,8.28) 27.88,6.5 v1(36.3,6.5)
  Bottom Layer w0.3: U1.70 25.71,8.705 26.1,8.315 v1(26.1,8.28) ; v1(36.3,6.5) 36.46,6.34 39.86,6.34 40.36,5.84 48.198,5.84 49.91,4.128 J6.6
M4_DIR1: J7.4 U1.9 | length 10.6
  Top Layer w0.3: v1@27.9,23.84 v1(27.86,23.84) 27.905,23.885 J7.4
  Bottom Layer w0.3: U1.9 27.21,24.49 v1(27.86,23.84)
M4_DIR2: J7.5 U1.8 | length 13.2
  Top Layer w0.3: J7.5 26.75,35 26.75,29.462 26.7,29.412 26.7,23.7 v1(26.71,23.71)
  Bottom Layer w0.3: v1(26.71,23.71) U1.8
M4_ENCA: J7.7 U1.7 | length 13.5
  Top Layer w0.3: v1(25.6,23.5) v1@25.6,23.6 ; v1(25.901,26.826) 25.901,27.276 26.1,27.475 v1(26.1,29.731)
  Bottom Layer w0.3: J7.7 24.095,31.255 25.85,29.5 25.869,29.5 v1(26.1,29.731) ; v1(25.6,23.5) 25.6,23.688 26.21,24.298 U1.7 26.21,26.359 25.901,26.668 v1(25.901,26.826)
M4_ENCB: J7.8 U1.6 | length 13.3
  Top Layer w0.3: v1(22.401,27.651) 22.401,25.649 v1(24.1,23.95)
  Bottom Layer w0.3: v1(22.401,27.651) 24.06,29.311 24.06,30.582 23.595,31.048 23.595,31.805 J7.8 ; v1(24.1,23.95) 24.35,24.2 25.405,24.2 25.71,24.505 U1.6
M4_PWM: J7.6 U1.69 | length 24.3
  Top Layer w0.3: v1(24.531,16.7) 24.531,18.708 24.9,19.076 24.9,23.719 25.45,24.269 25.45,26.358 25.251,26.557 25.251,27.333 25.45,27.532 25.45,32.49 J7.6
  Bottom Layer w0.3: v1(24.531,16.7) 24.531,15.659 25.277,14.914 25.277,13.718 26.21,12.785 U1.69
M5_DIR1: J8.4 U1.27 | length 13.1
  Top Layer w0.3: v1(37.775,28.25) 37.859,28.25 38.556,28.947 38.768,28.947 41.58,31.759 J8.4
  Bottom Layer w0.3: U1.27 36.1,23 36.01,23.09 36.01,23.986 37.45,25.426 37.45,26.086 37.775,26.411 v1(37.775,28.25)
M5_DIR2: J8.5 U1.26 | length 15.1
  Top Layer w0.3: v1(38.825,28.297) 42.85,32.322 42.85,32.719 40.454,35.115 J8.5
  Bottom Layer w0.3: U1.26 37.11,24.35 37.95,25.19 37.95,25.879 38.3,26.229 38.3,27.772 v1(38.825,28.297)
M5_ENCA: J8.7 U1.51 | length 30.3
  Top Layer w0.3: v1(33.3,12.2) 33.274,12.2 32.25,13.224 32.25,15.043 31.65,15.643 31.65,25.031 35.5,28.881 35.5,32.989 37.626,35.115 J8.7
  Bottom Layer w0.3: v1(33.3,12.2) 33.35,12.15 34.404,12.15 35.231,11.323 35.231,10.309 35.21,10.288 U1.51
M5_ENCB: J8.8 U1.50 | length 26.6
  Top Layer w0.3: v1(34.025,12.8) 34.025,12.974 33.901,12.85 33.331,12.85 32.75,13.431 32.75,15.25 32.15,15.85 32.15,24.824 36.5,29.174 J8.8
  Bottom Layer w0.3: v1(34.025,12.8) 34.461,12.8 35.761,11.5 U1.50
M5_PWM: J8.6 U1.68 | length 30.8
  Top Layer w0.3: v1(33.4,13.7) 33.25,13.85 33.25,15.457 32.65,16.057 32.65,24.617 39.04,31.007 J8.6
  Bottom Layer w0.3: U1.68 26.71,10.61 27.65,11.55 30.731,11.55 32.181,13 32.7,13 v1(33.4,13.7)
MISO: J10.4 U1.37 | length 30.5
  Top Layer w0.3: J10.4 10.24,12.8 19.373,12.8 21.875,15.302 21.875,15.876 22.576,16.577 22.576,17.545 22.972,17.941 23.873,17.941 v1(23.881,17.95)
  Bottom Layer w0.3: v1(23.881,17.95) 24.323,18.391 35.309,18.391 v1(35.5,18.2) 35.7,18.2 35.9,18 U1.37
MOSI: J10.3 U1.38 | length 28.4
  Top Layer w0.3: J10.3 12.81,11.5 12.81,11.897 13.213,12.3 19.58,12.3 22.393,15.113 22.375,15.131 22.375,15.669 23.226,16.52 v1(23.226,17.276)
  Bottom Layer w0.3: v1(23.226,17.276) 24.127,17.276 24.742,17.891 34.89,17.891 35.281,17.5 U1.38
NetF1_2: F1.2 J3.1 | length 4.6
  Top Layer w0.3: F1.2 49.5,20.762 49.5,22.5 50.374,23.374 J3.1
NetJ14_1: J14.1 J18.1 | length 5
  Top Layer w0.5: J18.1 J14.1
NetJ15_1: J15.1 J18.2 | length 2.5
  Top Layer w0.5: J18.2 J15.1
NetJ17_1: J17.1 J18.3 | length 5
  Top Layer w0.5: J18.3 J17.1
NetJ18_4: J18.4 J19.1 | length 2.5
  Top Layer w0.5: J18.4 J19.1
NetJ18_5: J18.5 J20.1 | length 5
  Top Layer w0.5: J18.5 J20.1
NetJ18_6: J18.6 J23.1 | length 2.5
  Top Layer w0.5: J18.6 J23.1
NetJ18_7: J18.7 J26.1 | length 5
  Top Layer w0.5: J18.7 J26.1
NetJ18_8: J18.8 J28.1 | length 2.5
  Top Layer w0.5: J18.8 J28.1
NetJ18_9: J18.9 J31.1 | length 5
  Top Layer w0.5: J18.9 J31.1
NetJ18_10: J18.10 J33.1 | length 2.5
  Top Layer w0.5: J18.10 J33.1
NetLED1_A: LED1.A R16.1 | length 1.5
  Top Layer w0.3: R16.1 LED1.A@42.95,20
NetLED2_A: LED2.A R17.1 | length 1.5
  Top Layer w0.3: R17.1@41.42,18.1 LED2.A@42.97,18.1
NetLED3_A: LED3.A R18.1 | length 1.5
  Top Layer w0.3: R18.1@41.42,16.2 LED3.A@42.97,16.2
NetLED4_A: LED4.A R19.1 | length 1.3
  Top Layer w0.3: LED4.A 40.225,27.2 R19.1
NetQ1_3: Q1.3 R7.2 | length 0.9
  Top Layer w0.3: R7.2@48.572,26.824 Q1.3@48.572,27.678
nRESET: C20.1 J2.6 R11.2 S1.2 U1.17 | length 19.5
  Top Layer w0.3: J2.6@11.69,32.96 12.15,32.5 12.37,32.5 13.919,30.951 15.492,30.951 16.294,30.15 19.865,30.15 S1.2@20.113,29.901 ; S1.2@20.213,29.801 S1.2@20.113,29.901 ; S1.2@20.35,29.5 20.031,29.819 S1.2@20.113,29.901
  Bottom Layer w0.3: v1(24.8,29.252) 25.229,29.252 26.381,28.1 28.96,28.1 R11.2 C20.1 U1.17
P0.27: J22.1 U1.25 | length 3.1
  Top Layer w0.3: v1(35,23.2) J22.1@35,24.023
  Bottom Layer w0.3: v1(35,23.2) 35,23.576 35.21,23.786 U1.25
P0.28: J39.1 U1.24 | length 2.7
  Top Layer w0.3: J39.1 33.684,23.216 v1(33.718,23.216)
  Bottom Layer w0.3: v1(33.718,23.216) 34.71,24.208 U1.24
P1.4: J43.1 U1.93 | length 3
  Top Layer w0.3: J43.1@18.34,19.136 18.576,18.9 v1(19.4,18.9)
  Bottom Layer w0.3: v1(19.4,18.9) 19.71,19.21 19.71,19.502 20.208,20 U1.93@20.605,20
P1.8: J44.1 U1.92 | length 4.7
  Top Layer w0.3: J44.1 v1(19.399,17.702)
  Bottom Layer w0.3: v1(19.399,17.702) 19.399,18.022 19.626,18.25 19.669,18.25 20.135,18.716 20.135,18.928 20.21,19.003 20.21,19.295 20.415,19.5 U1.92
P1.29: J12.1 U1.45 | length 2.4
  Top Layer w0.3: J12.1@35.1,13 35.115,12.985 35.131,13.001 v1(35.202,13.001)
  Bottom Layer w0.3: v1(35.202,13.001) 35.216,13.001 35.305,13.09 36.215,14 U1.45
P1.30: J13.1 U1.21 | length 4
  Bottom Layer w0.3: v1(30.8,23.09) 31.51,23.8 32.722,23.8 33.21,24.288 U1.21
P1.31: J16.1 U1.20 | length 4.8
  Bottom Layer w0.3: v1(29.4,22.968) 29.759,22.968 31.091,24.3 32.505,24.3 32.71,24.505 U1.20
P2.8: J35.1 U1.65 | length 4.4
  Top Layer w0.3: v1@28,11.002 28.1,10.902 v1(28.1,10.9) 28.179,10.9 28.287,10.792 29.031,11.535 29.397,11.535 30,12.139 J35.1@30,12.4
  Bottom Layer w0.3: v1@28,11.002 28.1,10.902 v1(28.1,10.9) 28.21,10.79 U1.65
P2.11: J36.1 U1.52 | length 5.9
  Top Layer w0.3: J36.1 31.3,12.5 31.6,12.2 v1(32.3,12.2)
  Bottom Layer w0.3: v1(32.3,12.2) 32.95,11.55 33.569,11.55 33.592,11.573 34.273,11.573 34.731,11.116 34.731,10.516 34.71,10.495 U1.52
RX0: J2.4 U1.99 | length 14.6
  Bottom Layer w0.3: J2.4@14.23,32.96 14.548,32.96 15.27,32.238 15.27,30.746 21.016,25 21.205,25 22.41,23.795 22.41,23.205 22.205,23 U1.99
RX2: J11.4 R14.2 U1.49 | length 9.5
  Top Layer w0.3: J11.4 43.902,12.7 45.002,11.6 R14.2
  Bottom Layer w0.3: U1.49 40.3,12 J11.4
RX3: J9.4 R12.2 U1.47 | length 16.5
  Top Layer w0.3: v1(44.6,14) 44.812,14.213 45.462,14.213 R12.2 46.132,14.882 46.132,15.387 46.77,16.025 50.257,16.025 51.16,16.928 J9.4 J9.4@51.16,17.24
  Bottom Layer w0.3: U1.47 39.179,13 40.379,14.2 44.4,14.2 v1(44.6,14)
SCK: J10.6 U1.34 | length 31.2
  Top Layer w0.3: J10.6 10.27,15.31 13.036,15.31 14.546,13.8 18.958,13.8 20.875,15.717 20.875,16.291 21.576,16.992 21.576,17.959 23.008,19.391 v1(23.06,19.391)
  Bottom Layer w0.3: v1(23.06,19.391) 35.091,19.391 35.4,19.7 v1(35.825,19.7) 36.015,19.7 36.215,19.5 U1.34
SSEL: J10.5 U1.35 | length 28.2
  Top Layer w0.3: J10.5 13.55,13.3 19.166,13.3 21.375,15.509 21.375,16.083 22.076,16.785 22.076,17.752 22.765,18.441 23.203,18.441 v1(23.353,18.591)
  Bottom Layer w0.3: v1(23.353,18.591) 23.353,18.609 23.386,18.642 23.374,18.654 23.611,18.891 35.298,18.891 35.407,19 U1.35
SWDCLK: J2.3 U1.5 | length 16.2
  Bottom Layer w0.3: J2.3@15.5,35.5 J2.3 16.54,34.06 17.391,34.06 18.34,33.111 18.34,30.505 21.845,27 24.505,27 25.21,26.295 U1.5
SWDIO: J2.7 U1.3 | length 20.7
  Bottom Layer w0.3: J2.7@10.42,35.5 11.02,36.1 13.374,36.1 13.96,35.514 13.96,35.226 15.626,33.56 17.184,33.56 17.84,32.904 17.84,30.298 21.638,26.5 24.1,26.5 24.21,26.39 U1.3
SWO: J2.2 U1.1 | length 11.1
  Bottom Layer w0.3: J2.2@16.77,32.96 J2.2 16.77,30.66 21.43,26 23,26 23.21,25.79 U1.1
TX0: J2.5 U1.98 | length 18.6
  Bottom Layer w0.3: J2.5@12.96,35.5 12.979,35.5 13.46,35.019 13.46,34.953 15.77,32.643 15.77,30.953 21.223,25.5 21.412,25.5 22.91,24.002 22.91,22.998 22.412,22.5 U1.98
TX2: J11.3 R15.2 U1.48 | length 10.5
  Top Layer w0.3: J11.3 43.848,11.43 45.178,10.1 R15.2
  Bottom Layer w0.3: U1.48 39.386,12.5 40.586,13.7 41.6,13.7 J11.3@43.468,11.832
TX3: J9.3 R13.2 U1.46 | length 20.5
  Top Layer w0.3: v1(45.282,13.104) 45.846,13.104 R13.2 45.9,13.1 46.75,13.95 46.75,15.298 46.952,15.5 50.441,15.5 50.881,15.94 J9.3
  Bottom Layer w0.3: U1.46 38.972,13.5 40.172,14.7 44.819,14.7 45.282,14.237 v1(45.282,13.104) ; J9.3@53.7,15.796 J9.3
USB_D+: C13.2 R7.1 R8.2 U1.29 | length 13.4
  Top Layer w0.3: v1(46.077,23.451) 46.3,23.451 46.372,23.524 R8.2 46.872,25.424 R7.1@46.872,26.824
  Bottom Layer w0.3: U1.29 42.44,22 43.891,23.451 v1(46.077,23.451)
USB_D-: C14.1 R9.2 U1.30 | length 11.7
  Top Layer w0.3: v1(45.827,22.651) 45.855,22.624 R9.2 C14.1
  Bottom Layer w0.3: U1.30 42.65,21.5 43.801,22.651 v1(45.827,22.651)
USB_SCON: Q1.1 U1.64 | length 40.6
  Top Layer w0.3: v1(29.3,10.885) 29.551,10.885 30.216,11.55 31.931,11.55 32.669,11.55 33.031,11.55 33.427,11.154 33.427,10.096 33.772,9.75 36.31,9.75 36.485,9.925 36.485,17.559 37.35,18.424 37.35,19.927 38.65,21.227 38.65,22.399 v1(38.902,22.651) ; v1@47.722,24.724 v1(47.722,24.774) 47.722,28.788 49.05,30.116 49.05,30.45
  Bottom Layer w0.3: U1.64 28.71,10.495 29.265,11.05 29.3,11.05 v1(29.3,10.885) ; v1(38.902,22.651) 39.053,22.5 42.233,22.5 43.857,24.124 47.072,24.124 v1(47.722,24.774)
VDDA: C15.1 L1.1 U1.10 U1.12 | length 5.3
  Bottom Layer w0.3: 27.7,27.25 27.71,27.24 U1.10 ; L1.1 28.71,26.85 U1.12
  Bottom Layer w0.8: C15.1 27.7,27.25 L1.1
X1: C26.1 U1.22 X1.3 | length 5.6
  Bottom Layer w0.3: C26.1 33.1,29.34 X1.3 33.71,27.95 U1.22
X2: C27.1 U1.23 X1.1 | length 3.8
  Bottom Layer w0.3: U1.23 34.21,26.3 X1.1 35.16,27.25 C27.1
pads on no net: C11.0 C12.0 C13.0 C14.0 C15.0 C16.0 C17.0 C18.0 C19.0 C20.0 C23.0 C26.0 C27.0 D1.0 D2.0 F1.0 J1.3 J1.drill J2.drill J3.4 J4.3 J4.drill J5.3 J5.drill J6.3 J6.drill J7.3 J7.drill J8.3 J8.drill J9.drill J10.drill J11.drill J18.drill L1.0 LED1.0 LED2.0 LED3.0 LED4.0 Q1.0 R7.0 R8.0 R9.0 R10.0 R11.0 R12.0 R13.0 R14.0 R15.0 R16.0 R17.0 R18.0 R19.0 U1.2 U1.4 U1.13 U1.14 U1.16 U1.18 U1.19 U1.39 U1.40 U1.43 U1.44 U1.88 U1.89 U1.90 U1.91 U1.100 X1.2 X1.4

## Polygon pours and split planes (outlines as drawn)
GND on Top Layer "GND_L01_P000" (solid, remove dead copper, pour order 0): 0,0 55,0 55,37 0,37
GND on Bottom Layer "GND_L02_P002" (solid, remove dead copper, pour order 2): 0,0 0,37 55,37 55,0

## Other copper
Top Layer:
  pour cut-out: 55,37 49,37 49,34 ccw(c52,34) 52,31 55,31
  pour cut-out: 0,5 0,11 3,11 cw(c3,8) 6,8 cw(c3,8) 3,5
  pour cut-out: 55,11 52,11 ccw(c52,8) 49,8 ccw(c52,8) 52,5 55,5
  pour cut-out: 0,37 0,31 3,31 ccw(c3,34) 6,34 6,37
Bottom Layer:
  pour cut-out: 55,37 55,31 52,31 cw(c52,34) 49,34 49,37
  pour cut-out: 0,5 3,5 ccw(c3,8) 6,8 ccw(c3,8) 3,11 0,11
  pour cut-out: 55,11 55,5 52,5 cw(c52,8) 49,8 cw(c52,8) 52,11
  pour cut-out: 0,37 6,37 6,34 cw(c3,34) 3,31 0,31
  pour cut-out: -2,35

## Silkscreen, mask and mechanical layers (free items; w line width, h text height)
Top Overlay:
  text "PROGRAMMER" at 21.1,31.1 h0.8 r180
  text "WIRE / IO" at 9.63,28.9 h0.8 r270
  text "3.3V LED" at 32.525,26.8 h0.8
  text "RESET" at 20.7,26.023 h0.8
  text "5V" at 43.65,21.775 h0.8 r90
  text "1.0" at 15.146,21.6 h0.8
  text "GND" at 40.5,21.125 h0.8 r90
  text "3.3V" at 42.05,20.85 h0.8 r90
  text "1.1" at 15.289,20.1 h0.8
  text "1.31" at 29.7,19.7 h0.8 r90
  text "1.30" at 31,19.7 h0.8 r90
  text "0.28" at 34.1,19.7 h0.8 r90
  text "0.27" at 35.4,19.7 h0.8 r90
  text "1" at 45.6,19.6 h0.8
  text "1.4" at 15.108,18.642 h0.8
  text "2" at 45.475,17.7 h0.8
  text "1.8" at 15.146,17.3 h0.8
  text "1.16" at 14.598,16.025 h0.8
  text "3" at 45.475,15.8 h0.8
  text "1.17" at 14.56,14.725 h0.8
  text "2.8" at 30.4,14.725 h0.8 r90
  text "0.4" at 29,14.7 h0.8 r90
  text "0.5" at 27.65,14.67 h0.8 r90
  text "2.11" at 31.7,14.625 h0.8 r90
  text "SPI" at 7.5,13.4 h0.8 r270
Mechanical 1:
  the board outline again, w0.01